# Allegro board demo.brd
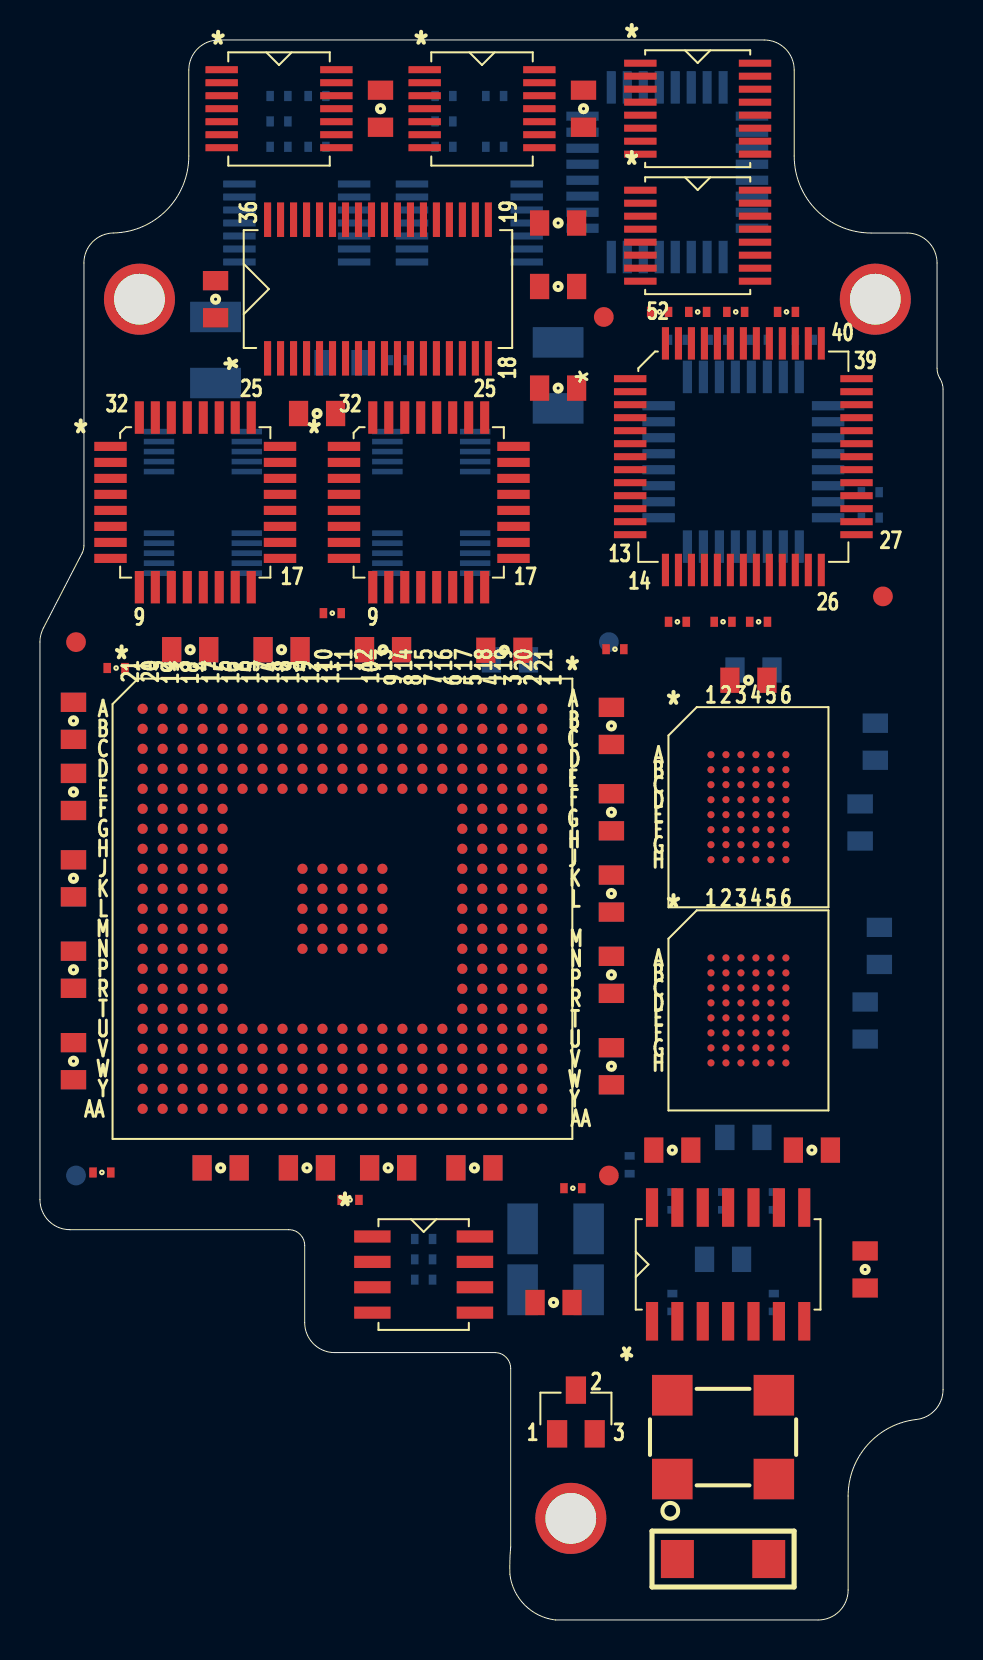
[diagram p0: board, top side]
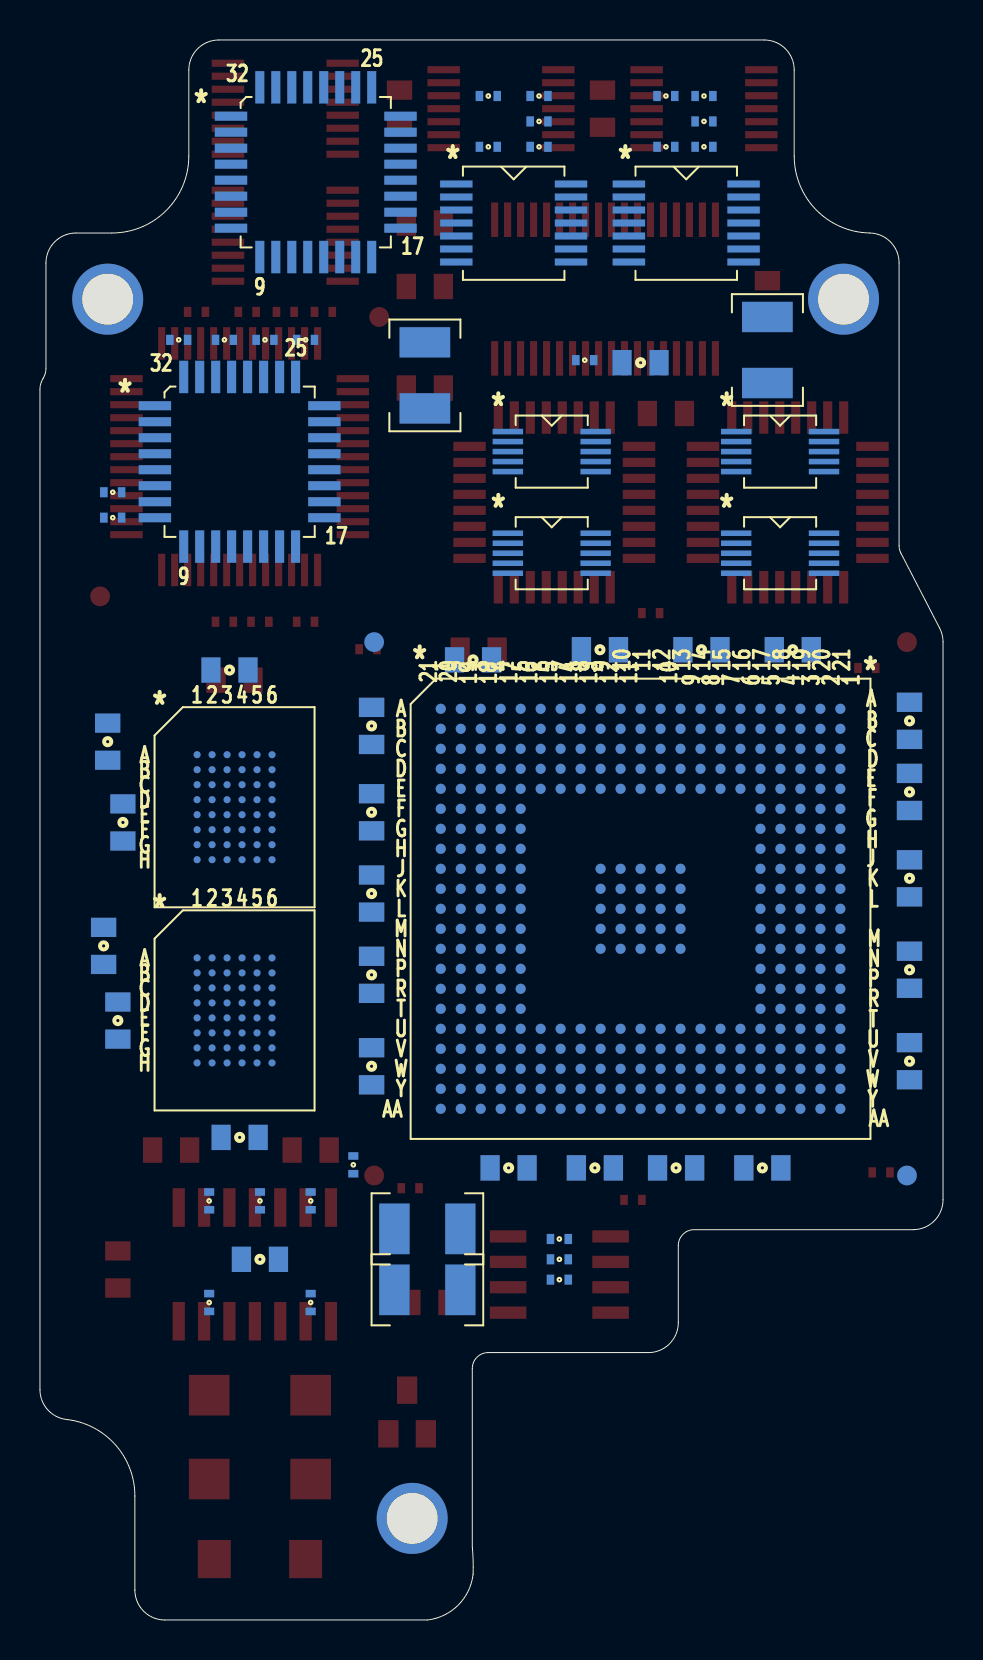
[diagram p1: board, bottom side, seen from below]

Outline 45.2 x 79 mm; copper layers: TOP, POWER, GND, BOTTOM. Coordinates in mm from the lower left corner of the outline.
Outline path: 0,48.9 0,21.02 arc(0.44,19.96) 1.5,19.52 12.46,19.52 arc(13.02,19.28) 13.25,18.73 13.25,14.87 arc(13.69,13.81) 14.75,13.37 22.77,13.37 arc(23.33,13.14) 23.56,12.58 23.56,3.65 arc(23.52,2.97) 23.52,2.29 arc(24.27,0.74) 25.81,0 38.95,0 arc(40.01,0.44) 40.45,1.5 40.45,6.2 arc(41.43,8.77) 43.87,10.03 arc(44.82,10.52) 45.2,11.52 45.2,61.54 arc(45.16,61.81) 45.05,62.06 arc(44.94,62.32) 44.9,62.59 44.9,67.85 arc(44.46,68.91) 43.4,69.35 41.6,69.35 arc(38.88,70.48) 37.75,73.2 37.75,77.5 arc(37.31,78.56) 36.25,79 8.95,79 arc(7.89,78.56) 7.45,77.5 7.45,73.2 arc(6.35,70.5) 3.67,69.35 arc(2.63,68.9) 2.2,67.85 2.2,53.71 arc(2.18,53.52) 2.11,53.35 0.17,49.59 arc(0.04,49.26) 0,48.9

## Design rules (mm)
constraint set DEFAULT: min track width 0.127
net group DP1: nets PECL1_N PECL1_P
net group DP2: nets PECL2_N PECL2_P
net group ADDR_BUS: nets ADDR0 ADDR1 ADDR2 ADDR3 ADDR4 ADDR5 ADDR6 ADDR7 ADDR8 ADDR9 ADDR10

## Placement (name value [footprint] x y rotation side)
C1  120PF  [SMC0805]  28.6 32.26 90 top
C2  120PF  [SMC0805]  1.68 44.96 90 top
C3  120PF  [SMC0805]  1.68 41.4 90 top
C4  120PF  [SMC0805]  1.68 37.08 90 top
C5  120PF  [SMC0805]  1.68 27.94 90 top
C6  120PF  [SMC0805]  1.68 32.51 90 top
C7  120PF  [SMC0805]  17.17 48.51 0 top
C8  120PF  [SMC0805]  28.6 44.7 90 top
C9  120PF  [SMC0805]  28.6 40.39 90 top
C10  120PF  [SMC0805]  28.6 36.32 90 top
C11  120PF  [SMC0805]  28.6 27.69 90 top
C12  120PF  [SMC0805]  23.24 48.49 0 top
C13  120PF  [SMC0805]  9.04 22.61 0 top
C14  120PF  [SMC0805]  13.36 22.61 0 top
C15  120PF  [SMC0805]  17.43 22.61 0 top
C16  120PF  [SMC0805]  21.74 22.61 0 top
C17  120PF  [SMC0805]  35.46 46.99 0 top
C18  120PF  [SMC0805]  41.3 17.53 90 top
C19  120PF  [SMC0805]  7.52 48.51 0 top
C20  120PF  [SMC0805]  12.09 48.51 0 top
C21  120PF  [SMC0805]  1.68 37.08 90 bottom
C22  120PF  [SMC0805]  1.68 32.51 90 bottom
C23  120PF  [SMC0805]  12.09 48.51 0 bottom
C24  120PF  [SMC0805]  1.68 27.94 90 bottom
C25  120PF  [SMC0805]  9.04 22.61 0 bottom
C26  120PF  [SMC0805]  17.17 48.51 0 bottom
C27  120PF  [SMC0805]  23.52 48.01 0 bottom
C28  120PF  [SMC0805]  28.6 44.7 90 bottom
C29  120PF  [SMC0805]  28.6 40.39 90 bottom
C30  120PF  [SMC0805]  28.6 36.32 90 bottom
C31  120PF  [SMC0805]  28.6 32.26 90 bottom
C32  120PF  [SMC0805]  7.52 48.51 0 bottom
C33  120PF  [SMC0805]  17.43 22.61 0 bottom
C34  120PF  [SMC0805]  13.36 22.61 0 bottom
C35  120PF  [SMC0805]  21.74 22.61 0 bottom
C36  120PF  [SMC0805]  28.6 27.69 90 bottom
C37  120PF  [SMC0805]  35.21 24.13 0 bottom
C38  120PF  [SMC0805]  35.71 47.5 0 bottom
C39  120PF  [SMC0805]  1.68 41.4 90 bottom
C40  120PF  [SMC0805]  1.68 44.96 90 bottom
C41  10uF  [1210RF]  8.79 63.5 270 bottom
C42  10uF  [1210RF]  25.93 62.23 270 bottom
C43  10uF  [1210RF]  25.81 16.51 180 bottom
C44  10uF  [1210RF]  25.81 19.56 180 bottom
C45  120PF  [SMC0805]  15.14 62.86 180 bottom
C46  120PF  [SMC0805]  41.3 29.97 90 bottom
C47  120PF  [SMC0805]  42.01 33.71 90 bottom
C48  120PF  [SMC0805]  41.81 43.92 270 bottom
C49  120PF  [SMC0805]  41.05 39.88 90 bottom
C50  120PF  [SMC0805]  34.19 18.03 180 bottom
C51  .1UF  [R_0402]  3.81 47.6 0 top
C52  .1UF  [R_0402]  14.63 50.34 0 top
C53  .1UF  [R_0402]  3.1 22.38 0 top
C54  .1UF  [R_0402]  28.78 48.54 0 top
C55  .1UF  [R_0402]  15.52 21.01 0 top
C56  .1UF  [R_0402]  26.67 21.59 0 top
C57  .1UF  [R_0402]  31.01 65.41 0 top
C58  .1UF  [R_0402]  32.92 65.41 0 top
C59  .1UF  [R_0402]  34.19 49.91 0 top
C60  .1UF  [R_0402]  31.9 49.91 0 top
C61  120PF  [SMC0805]  25.93 66.67 0 top
C62  120PF  [SMC0805]  38.63 23.5 0 top
C63  120PF  [SMC0805]  8.79 66.04 90 top
C64  120PF  [SMC0805]  25.93 69.85 0 top
C65  120PF  [SMC0805]  17.04 75.57 90 top
C66  120PF  [SMC0805]  27.2 75.57 90 top
C67  120PF  [SMC0805]  31.65 23.5 0 top
C68  120PF  [SMC0805]  25.71 15.88 0 top
C69  120PF  [SMC0805]  25.93 61.6 0 top
C70  120PF  [SMC0805]  13.87 60.33 0 top
D1  -  [SOT23_132]  26.82 10.41 0 top
D2  V  [SMF1806]  34.19 3.05 180 top
NOREF  -  [unnamed]  4.98 66.04 0 top
NOREF#2  -  [#2]  -86.33 -76.07 0 top
NOREF#3  -  [unnamed]  26.57 5.08 0 top
NOREF#4  -  [unnamed]  41.81 66.04 0 top
R1  10K  [R_0402]  34.82 65.41 0 top
R2  10K  [R_0402]  37.36 65.41 0 top
R3  10K  [R_0402]  31.9 64.01 180 bottom
R4  10K  [R_0402]  33.94 64.01 180 bottom
R5  10K  [R_0402]  35.97 64.01 180 bottom
R6  10K  [R_0402]  38.25 64.01 180 bottom
R7  10K  [R_0402]  17.93 62.99 180 bottom
R8  10K  [R_0402]  22.76 73.66 180 bottom
R9  10K  [R_0402]  13.87 76.2 180 bottom
R10  10K  [R_0402]  13.87 73.66 180 bottom
R11  10K  [R_0402]  35.97 49.91 0 top
R12  10K  [R_0402]  22.76 76.2 180 bottom
R13  10K  [R_0402]  20.22 76.2 180 bottom
R14  10K  [R_0402]  11.96 73.66 180 bottom
R15  10K  [R_0402]  11.96 76.2 180 bottom
R16  10K  [R_0402]  11.96 74.93 180 bottom
R17  10K  [R_0402]  20.22 74.93 180 bottom
R18  10K  [R_0402]  20.22 73.66 180 bottom
R19  10K  [R_0402]  41.56 56.39 180 bottom
R20  10K  [R_0402]  19.2 18.03 180 bottom
R21  10K  [R_0402]  19.2 19.05 180 bottom
R22  10K  [R_0402]  19.2 17.02 180 bottom
R23  10K  [R_0402]  41.56 55.12 180 bottom
R24  10K  [R_0402]  29.52 22.76 90 bottom
R25  10K  [R_0402]  31.65 20.96 90 bottom
R26  10K  [R_0402]  36.73 15.88 90 bottom
R27  10K  [R_0402]  34.19 20.96 90 bottom
R28  10K  [R_0402]  31.65 15.88 90 bottom
R29  10K  [R_0402]  36.73 20.96 90 bottom
U1  -  [TSSOP14_26CC_BD4-4MM]  11.96 75.57 0 top
U2  -  [TSSOP14_26CC_BD4-4MM]  22.12 75.57 0 top
U3  -  [TSSOP14_26CC_BD4-4MM]  12.85 69.85 180 bottom
U4  -  [TSSOP14_26CC_BD4-4MM]  21.49 69.85 180 bottom
U5  -  [BGA345_BD23X23MM]  15.14 35.56 0 top
U6  -  [BGA345_BD23X23MM]  15.14 35.56 180 bottom
U7  -  [BGA48_BD7-5X9-5MM]  35.46 40.64 0 top
U8  -  [BGA48_BD7-5X9-5MM]  35.46 30.48 0 top
U9  -  [BGA48_BD7-5X9-5MM]  35.46 40.64 180 bottom
U10  -  [BGA48_BD7-5X9-5MM]  35.46 30.48 180 bottom
U11  -  [SO14NB]  34.44 17.78 90 top
U12  -  [TQFP52_BD10X10MM_THERM]  35.21 58.17 0 top
U13  -  [SSOP36_26CC_BD5-3MM]  16.92 66.55 90 top
U14  -  [SO8NB_V2]  19.2 17.27 0 top
U15  -  [TSSOP16_26CC_BD4-4MM]  32.92 69.22 0 top
U16  -  [TSSOP16_26CC_BD4-4MM]  32.92 75.57 0 top
U17  -  [TQFP32_32CC_BD7X7MM]  7.77 55.88 0 top
U18  -  [TQFP32_32CC_BD7X7MM]  19.46 55.88 0 top
U19  -  [TQFP32_32CC_BD7X7MM]  35.21 57.91 180 bottom
U20  -  [TQFP32_32CC_BD7X7MM]  31.4 72.39 180 bottom
U21  -  [MSOP10_20CC_BD3MM]  8.15 58.42 180 bottom
U22  -  [MSOP10_20CC_BD3MM]  8.15 53.34 180 bottom
U23  -  [MSOP10_20CC_BD3MM]  19.58 58.42 180 bottom
U24  -  [MSOP10_20CC_BD3MM]  19.58 53.34 180 bottom
Y1  -  [4CERAMIC]  34.19 9.14 90 top

## Library data of the parts
C1-C40 C45-C50 C61-C70 = CAP: Tolerance: 5%; alternate symbols: (VSMC0805L,VSMC0805R,VSMC0805B,SMC0805); part number: CAP_805-120PF,5%,50V,805; signal model: capacitor120pF; tolerance: 5%
C41-C44 = CAP: Tolerance: +80-20%; User Part Number: 110-1925-01; alternate symbols: (1210RF_WVI_10P;1210RF_V12P;1210WS;1210WS_WVI_10P); part number: CAP_SMT1210-110-1925-01,10UF,+80-20%,16V; tolerance: +80-20%
C51-C60 = CAP: alternate symbols: (VSMC0603L,VSMC0603R,VSMC0603B,SMC0603); part number: CAP_402-.1UF,&10%,80%,6.3V; signal model: capacitor0pF; tolerance: 10%
D1 = RCNET: User Part Number: 120-3831-01; Tolerance: 10%; part number: RCNET_SOT23-120-3831-01,CTXS03,50,46.4,50,150PF,10%; tolerance: 10%
D2 = BEAD_1806: Tolerance: T; User Part Number: P; part number: BEAD_1806_SMF1806-FBMH4516,TAIYO_FERRITE_BEAD,6A
R1-R29 = RES: alternate symbols: (VSMR0402B,VSMR0402R,VSMR0402L,0402); part number: RES_402-10K,1%,0402; signal model: resistor10K; tolerance: 1%
U1-U4 = LVC07: User Part Number: 100-7328-01; Tolerance: ***; part number: LVC07_TSSOP-100-7328-01,APW
U5 U6 = TALON: User Part Number: 528-1123-01; Tolerance: ***; alternate symbols: (BGA345_BD23X23MM_NF); part number: TALON_BGA345-528-1123-01
U7-U10 = SRAM1MX16: User Part Number: 102-0026-01; Tolerance: ***; part number: SRAM1MX16_BGA-102-0026-01,55NS,K6F1616U6A-EF55
U11 = LVC00: User Part Number: 100-4554-01; Tolerance: ***; part number: LVC00_SO-100-4554-01
U12 = MC100ES6220: User Part Number: 103-0009-01; Tolerance: ***; alternate symbols: (TQFP52_BD10X10MM_THERM_NF); part number: MC100ES6220_TQFP-103-0009-01
U13 = LTC3731: User Part Number: 104-0019-01; Tolerance: ***; part number: LTC3731_SSOP36-104-0019-01
U14 = EEPROM8KX8: Tolerance: ***; User Part Number: 101-0054-01; part number: EEPROM8KX8_SO8-101-0054-01,M34D64
U15 U16 = PCA9554: User Part Number: 100-7579-01; Tolerance: ***; part number: PCA9554_TSSOP-100-7579-01
U17-U20 = CY2HH8110: Tolerance: ***; User Part Number: 100-7829-01; part number: CY2HH8110_TQFP-100-7829-01
U21-U24 = MAX1343: User Part Number: 104-0099-01; Tolerance: ***; part number: MAX1343_MSOP-104-0099-01,10BITADC
Y1 = OSC: part number: OSC_CERAMIC-66.00MHZ,CLOCKING,SG8002JF

## Footprints (pads in the part's own frame, mm; a bottom-side part is the same pattern mirrored in y, then rotated)
4CERAMIC
  rect 2.032x2.032 smd: 1(-2.095,2.54) 2(-2.095,-2.54) 3(2.095,-2.54) 4(2.095,2.54)
1210RF
  rect 1.524x2.54 smd: 1(-1.651,0) 2(1.651,0)
BGA48_BD7-5X9-5MM
  round 0.356 smd: A1(-1.875,2.625) A2(-1.125,2.625) A3(-0.375,2.625) A4(0.375,2.625) A5(1.125,2.625) A6(1.875,2.625) B1(-1.875,1.875) B2(-1.125,1.875) B3(-0.375,1.875) B4(0.375,1.875) B5(1.125,1.875) B6(1.875,1.875) C1(-1.875,1.125) C2(-1.125,1.125) C3(-0.375,1.125) C4(0.375,1.125) C5(1.125,1.125) C6(1.875,1.125) D1(-1.875,0.375) D2(-1.125,0.375) D3(-0.375,0.375) D4(0.375,0.375) D5(1.125,0.375) D6(1.875,0.375) E1(-1.875,-0.375) E2(-1.125,-0.375) E3(-0.375,-0.375) E4(0.375,-0.375) E5(1.125,-0.375) E6(1.875,-0.375) F1(-1.875,-1.125) F2(-1.125,-1.125) F3(-0.375,-1.125) F4(0.375,-1.125) F5(1.125,-1.125) F6(1.875,-1.125) G1(-1.875,-1.875) G2(-1.125,-1.875) G3(-0.375,-1.875) G4(0.375,-1.875) G5(1.125,-1.875) G6(1.875,-1.875) H1(-1.875,-2.625) H2(-1.125,-2.625) H3(-0.375,-2.625) H4(0.375,-2.625) H5(1.125,-2.625) H6(1.875,-2.625)
BGA345_BD23X23MM
  round 0.991 smd: (-13.335,13.335) (13.335,-13.335)
  round 0.508 smd: A1(-10,10) A2(-9,10) A3(-8,10) A4(-7,10) A5(-6,10) A6(-5,10) A7(-4,10) A8(-3,10) A9(-2,10) A10(-1,10) A11(0,10) A12(1,10) A13(2,10) A14(3,10) A15(4,10) A16(5,10) A17(6,10) A18(7,10) A19(8,10) A20(9,10) A21(10,10) AA1(-10,-10) AA2(-9,-10) AA3(-8,-10) AA4(-7,-10) AA5(-6,-10) AA6(-5,-10) AA7(-4,-10) AA8(-3,-10) AA9(-2,-10) AA10(-1,-10) AA11(0,-10) AA12(1,-10) AA13(2,-10) AA14(3,-10) AA15(4,-10) AA16(5,-10) AA17(6,-10) AA18(7,-10) AA19(8,-10) AA20(9,-10) AA21(10,-10) B1(-10,9) B2(-9,9) B3(-8,9) B4(-7,9) B5(-6,9) B6(-5,9) B7(-4,9) B8(-3,9) B9(-2,9) B10(-1,9) B11(0,9) B12(1,9) B13(2,9) B14(3,9) B15(4,9) B16(5,9) B17(6,9) B18(7,9) B19(8,9) B20(9,9) B21(10,9) C1(-10,8) C2(-9,8) C3(-8,8) C4(-7,8) C5(-6,8) C6(-5,8) C7(-4,8) C8(-3,8) C9(-2,8) C10(-1,8) C11(0,8) C12(1,8) C13(2,8) C14(3,8) C15(4,8) C16(5,8) C17(6,8) C18(7,8) C19(8,8) C20(9,8) C21(10,8) D1(-10,7) D2(-9,7) D3(-8,7) D4(-7,7) D5(-6,7) D6(-5,7) D7(-4,7) D8(-3,7) D9(-2,7) D10(-1,7) D11(0,7) D12(1,7) D13(2,7) D14(3,7) D15(4,7) D16(5,7) D17(6,7) D18(7,7) D19(8,7) D20(9,7) D21(10,7) E1(-10,6) E2(-9,6) E3(-8,6) E4(-7,6) E5(-6,6) E6(-5,6) E7(-4,6) E8(-3,6) E9(-2,6) E10(-1,6) E11(0,6) E12(1,6) E13(2,6) E14(3,6) E15(4,6) E16(5,6) E17(6,6) E18(7,6) E19(8,6) E20(9,6) E21(10,6) F1(-10,5) F2(-9,5) F3(-8,5) F4(-7,5) F5(-6,5) F17(6,5) F18(7,5) F19(8,5) F20(9,5) F21(10,5) G1(-10,4) G2(-9,4) G3(-8,4) G4(-7,4) G5(-6,4) G17(6,4) G18(7,4) G19(8,4) G20(9,4) G21(10,4) H1(-10,3) H2(-9,3) H3(-8,3) H4(-7,3) H5(-6,3) H17(6,3) H18(7,3) H19(8,3) H20(9,3) H21(10,3) J1(-10,2) J2(-9,2) J3(-8,2) J4(-7,2) J5(-6,2) J9(-2,2) J10(-1,2) J11(0,2) J12(1,2) J13(2,2) J17(6,2) J18(7,2) J19(8,2) J20(9,2) J21(10,2) K1(-10,1) K2(-9,1) K3(-8,1) K4(-7,1) K5(-6,1) K9(-2,1) K10(-1,1) K11(0,1) K12(1,1) K13(2,1) K17(6,1) K18(7,1) K19(8,1) K20(9,1) K21(10,1) L1(-10,0) L2(-9,0) L3(-8,0) L4(-7,0) L5(-6,0) L9(-2,0) L10(-1,0) L11(0,0) L12(1,0) L13(2,0) L17(6,0) L18(7,0) L19(8,0) L20(9,0) L21(10,0) M1(-10,-1) M2(-9,-1) M3(-8,-1) M4(-7,-1) M5(-6,-1) M9(-2,-1) M10(-1,-1) M11(0,-1) M12(1,-1) M13(2,-1) M17(6,-1) M18(7,-1) M19(8,-1) M20(9,-1) M21(10,-1) N1(-10,-2) N2(-9,-2) N3(-8,-2) N4(-7,-2) N5(-6,-2) N9(-2,-2) N10(-1,-2) N11(0,-2) N12(1,-2) N13(2,-2) N17(6,-2) N18(7,-2) N19(8,-2) N20(9,-2) N21(10,-2) P1(-10,-3) P2(-9,-3) P3(-8,-3) P4(-7,-3) P5(-6,-3) P17(6,-3) P18(7,-3) P19(8,-3) P20(9,-3) P21(10,-3) R1(-10,-4) R2(-9,-4) R3(-8,-4) R4(-7,-4) R5(-6,-4) R17(6,-4) R18(7,-4) R19(8,-4) R20(9,-4) R21(10,-4) T1(-10,-5) T2(-9,-5) T3(-8,-5) T4(-7,-5) T5(-6,-5) T17(6,-5) T18(7,-5) T19(8,-5) T20(9,-5) T21(10,-5) U1(-10,-6) U2(-9,-6) U3(-8,-6) U4(-7,-6) U5(-6,-6) U6(-5,-6) U7(-4,-6) U8(-3,-6) U9(-2,-6) U10(-1,-6) U11(0,-6) U12(1,-6) U13(2,-6) U14(3,-6) U15(4,-6) U16(5,-6) U17(6,-6) U18(7,-6) U19(8,-6) U20(9,-6) U21(10,-6) V1(-10,-7) V2(-9,-7) V3(-8,-7) V4(-7,-7) V5(-6,-7) V6(-5,-7) V7(-4,-7) V8(-3,-7) V9(-2,-7) V10(-1,-7) V11(0,-7) V12(1,-7) V13(2,-7) V14(3,-7) V15(4,-7) V16(5,-7) V17(6,-7) V18(7,-7) V19(8,-7) V20(9,-7) V21(10,-7) W1(-10,-8) W2(-9,-8) W3(-8,-8) W4(-7,-8) W5(-6,-8) W6(-5,-8) W7(-4,-8) W8(-3,-8) W9(-2,-8) W10(-1,-8) W11(0,-8) W12(1,-8) W13(2,-8) W14(3,-8) W15(4,-8) W16(5,-8) W17(6,-8) W18(7,-8) W19(8,-8) W20(9,-8) W21(10,-8) Y1(-10,-9) Y2(-9,-9) Y3(-8,-9) Y4(-7,-9) Y5(-6,-9) Y6(-5,-9) Y7(-4,-9) Y8(-3,-9) Y9(-2,-9) Y10(-1,-9) Y11(0,-9) Y12(1,-9) Y13(2,-9) Y14(3,-9) Y15(4,-9) Y16(5,-9) Y17(6,-9) Y18(7,-9) Y19(8,-9) Y20(9,-9) Y21(10,-9)
MSOP10_20CC_BD3MM
  rect 1.524x0.279 smd: 1(-2.197,1) 2(-2.197,0.5) 3(-2.197,0) 4(-2.197,-0.5) 5(-2.197,-1) 6(2.197,-1) 7(2.197,-0.5) 8(2.197,0) 9(2.197,0.5) 10(2.197,1)
R_0402
  rect 0.381x0.508 smd: 1(-0.445,0) 2(0.445,0)
SMC0805
  rect 0.965x1.27 smd: 1(-0.927,0) 2(0.927,0)
SMF1806
  rect 1.651x1.905 smd: 1(-2.286,0) 2(2.286,0)
SO8NB_V2
  rect 1.829x0.61 smd: 1(-2.565,1.905) 2(-2.565,0.635) 3(-2.565,-0.635) 4(-2.565,-1.905) 5(2.565,-1.905) 6(2.565,-0.635) 7(2.565,0.635) 8(2.565,1.905)
SO14NB
  rect 1.93x0.61 smd: 1(-2.845,3.81) 2(-2.845,2.54) 3(-2.845,1.27) 4(-2.845,0) 5(-2.845,-1.27) 6(-2.845,-2.54) 7(-2.845,-3.81) 8(2.845,-3.81) 9(2.845,-2.54) 10(2.845,-1.27) 11(2.845,0) 12(2.845,1.27) 13(2.845,2.54) 14(2.845,3.81)
SOT23_132
  rect 1.016x1.372 smd: 1(-0.94,-1.105) 2(0,1.079) 3(0.94,-1.105)
SSOP36_26CC_BD5-3MM
  rect 1.727x0.356 smd: 1(-3.467,5.525) 2(-3.467,4.875) 3(-3.467,4.225) 4(-3.467,3.575) 5(-3.467,2.925) 6(-3.467,2.275) 7(-3.467,1.625) 8(-3.467,0.975) 9(-3.467,0.325) 10(-3.467,-0.325) 11(-3.467,-0.975) 12(-3.467,-1.625) 13(-3.467,-2.275) 14(-3.467,-2.925) 15(-3.467,-3.575) 16(-3.467,-4.225) 17(-3.467,-4.875) 18(-3.467,-5.525) 19(3.467,-5.525) 20(3.467,-4.875) 21(3.467,-4.225) 22(3.467,-3.575) 23(3.467,-2.925) 24(3.467,-2.275) 25(3.467,-1.625) 26(3.467,-0.975) 27(3.467,-0.325) 28(3.467,0.325) 29(3.467,0.975) 30(3.467,1.625) 31(3.467,2.275) 32(3.467,2.925) 33(3.467,3.575) 34(3.467,4.225) 35(3.467,4.875) 36(3.467,5.525)
TQFP32_32CC_BD7X7MM
  rect 1.626x0.457 smd: 1(-4.242,2.8) 2(-4.242,2) 3(-4.242,1.2) 4(-4.242,0.4) 5(-4.242,-0.4) 6(-4.242,-1.2) 7(-4.242,-2) 8(-4.242,-2.8) 17(4.242,-2.8) 18(4.242,-2) 19(4.242,-1.2) 20(4.242,-0.4) 21(4.242,0.4) 22(4.242,1.2) 23(4.242,2) 24(4.242,2.8)
  rect 0.457x1.626 smd: 9(-2.8,-4.242) 10(-2,-4.242) 11(-1.2,-4.242) 12(-0.4,-4.242) 13(0.4,-4.242) 14(1.2,-4.242) 15(2,-4.242) 16(2.8,-4.242) 25(2.8,4.242) 26(2,4.242) 27(1.2,4.242) 28(0.4,4.242) 29(-0.4,4.242) 30(-1.2,4.242) 31(-2,4.242) 32(-2.8,4.242)
TQFP52_BD10X10MM_THERM
  round 0.991 smd: (-6.985,6.985) (6.985,-6.985)
  rect 1.626x0.356 smd: 1(-5.664,3.9) 2(-5.664,3.25) 3(-5.664,2.6) 4(-5.664,1.95) 5(-5.664,1.3) 6(-5.664,0.65) 7(-5.664,0) 8(-5.664,-0.65) 9(-5.664,-1.3) 10(-5.664,-1.95) 11(-5.664,-2.6) 12(-5.664,-3.25) 13(-5.664,-3.9) 27(5.664,-3.9) 28(5.664,-3.25) 29(5.664,-2.6) 30(5.664,-1.95) 31(5.664,-1.3) 32(5.664,-0.65) 33(5.664,0) 34(5.664,0.65) 35(5.664,1.3) 36(5.664,1.95) 37(5.664,2.6) 38(5.664,3.25) 39(5.664,3.9)
  rect 0.356x1.626 smd: 14(-3.9,-5.664) 15(-3.25,-5.664) 16(-2.6,-5.664) 17(-1.95,-5.664) 18(-1.3,-5.664) 19(-0.65,-5.664) 20(0,-5.664) 21(0.65,-5.664) 22(1.3,-5.664) 23(1.95,-5.664) 24(2.6,-5.664) 25(3.25,-5.664) 26(3.9,-5.664) 40(3.9,5.664) 41(3.25,5.664) 42(2.6,5.664) 43(1.95,5.664) 44(1.3,5.664) 45(0.65,5.664) 46(0,5.664) 47(-0.65,5.664) 48(-1.3,5.664) 49(-1.95,5.664) 50(-2.6,5.664) 51(-3.25,5.664) 52(-3.9,5.664)
TSSOP14_26CC_BD4-4MM
  rect 1.626x0.356 smd: 1(-2.87,1.95) 2(-2.87,1.3) 3(-2.87,0.65) 4(-2.87,0) 5(-2.87,-0.65) 6(-2.87,-1.3) 7(-2.87,-1.95) 8(2.87,-1.95) 9(2.87,-1.3) 10(2.87,-0.65) 11(2.87,0) 12(2.87,0.65) 13(2.87,1.3) 14(2.87,1.95)
TSSOP16_26CC_BD4-4MM
  rect 1.626x0.356 smd: 1(-2.87,2.275) 2(-2.87,1.625) 3(-2.87,0.975) 4(-2.87,0.325) 5(-2.87,-0.325) 6(-2.87,-0.975) 7(-2.87,-1.625) 8(-2.87,-2.275) 9(2.87,-2.275) 10(2.87,-1.625) 11(2.87,-0.975) 12(2.87,-0.325) 13(2.87,0.325) 14(2.87,0.975) 15(2.87,1.625) 16(2.87,2.275)
unnamed
  round 3.556 hole 2.54 unplated: (0,0)

## Nets
GND: C1.2(B<0>) C2.2(B<0>) C3.2(B<0>) C4.2(B<0>) C5.2(B<0>) C6.2(B<0>) C7.2(B<0>) C8.2(B<0>) C9.2(B<0>) C10.2(B<0>) C11.2(B<0>) C12.2(B<0>) C13.2(B<0>) C14.2(B<0>) C15.2(B<0>) C16.2(B<0>) C17.2(B<0>) C18.2(B<0>) C19.2(B<0>) C20.2(B<0>) C21.2(B<0>) C22.2(B<0>) C23.2(B<0>) C24.2(B<0>) C25.2(B<0>) C26.2(B<0>) C27.2(B<0>) C28.2(B<0>) C29.2(B<0>) C30.2(B<0>) C31.2(B<0>) C32.2(B<0>) C33.2(B<0>) C34.2(B<0>) C35.2(B<0>) C36.2(B<0>) C37.2(B<0>) C38.2(B<0>) C39.2(B<0>) C40.2(B<0>) C41.2(B<0>) C42.2(B<0>) C43.1 C44.1 C45.2(B<0>) C46.2(B<0>) C47.2(B<0>) C48.2(B<0>) C49.2(B<0>) C50.2(B<0>) C51.2(B<0>) C52.2(B<0>) C53.2(B<0>) C54.2(B<0>) C55.2(B<0>) C56.2(B<0>) C57.2(B<0>) C58.2(B<0>) C59.2(B<0>) C60.2(B<0>) U1.1 U2.1 U3.1 U4.1 U6.C6 U6.C10 U6.C14 U6.C17 U6.D3 U6.F19 U6.G20 U6.K3 U6.K9 U6.K11 U6.K13 U6.M9 U6.M11 U6.M13 U6.M19 U6.N17 U6.P3 U6.U18 U6.V7 U6.V13 U9.D3 U9.D4 U9.F3 U9.F4 U10.D3 U10.D4 U10.F3 U10.F4 U11.7 U12.7 U12.13 U12.20 U12.26 U12.29 U12.36 U12.45 U12.52 U13.7 U13.15 U13.22 U13.34 U14.1 U14.7(WC_N) U15.1 U16.1 U17.4 U17.13 U17.21 U17.28 U18.4 U18.13 U18.21 U18.29(VDD<8>) U19.3 U19.14 U19.18 U19.22 U19.28 U20.4 U20.13 U20.18 U20.29(VDD<8>) U21.1 U22.1 U23.1 U24.1
VCC: C1.1 C2.1 C3.1 C4.1 C5.1 C6.1 C7.1 C8.1 C9.1 C10.1 C11.1 C12.1 C13.1 C14.1 C15.1 C16.1 C17.1 C18.1 C19.1 C20.1 C21.1 C22.1 C23.1 C24.1 C25.1 C26.1 C27.1 C28.1 C29.1 C30.1 C31.1 C32.1 C33.1 C34.1 C35.1 C36.1 C37.1 C38.1 C39.1 C40.1 C41.1 C42.1 C43.2(B<0>) C44.2(B<0>) C45.1 C46.1 C47.1 C48.1 C49.1 C50.1 C51.1 C52.1 C53.1 C54.1 C55.1 C56.1 C57.1 C58.1 C59.1 C60.1 D2.1 R22.2(B<0>) R23.2(B<0>) R24.2(B<0>) R25.2(B<0>) R26.2(B<0>) R27.2(B<0>) R28.2(B<0>) R29.2(B<0>) U1.5 U1.8 U2.5 U2.8 U3.8 U4.8 U6.B12 U6.C16 U6.C18 U6.D6 U6.D10 U6.D14 U6.D17 U6.D20 U6.E3 U6.F2 U6.G5 U6.G19 U6.H19 U6.H20 U6.J3 U6.J9 U6.J10 U6.J11 U6.J12 U6.J13 U6.K10 U6.K12 U6.L2 U6.L9 U6.L10 U6.L11 U6.L12 U6.L13 U6.L17 U6.M5 U6.M10 U6.M12 U6.M18 U6.N3 U6.N9 U6.N10 U6.N11 U6.N12 U6.N13 U6.N19 U6.R17 U6.T5 U6.T18 U6.U13 U6.U16 U6.U17 U6.V6 U6.V12 U6.W16 U9.C3 U9.C4 U9.E3 U9.E4 U10.C3 U10.C4 U10.E3 U10.E4 U11.14 U12.6 U12.12 U12.19 U12.25 U12.28 U12.37 U13.5 U13.18 U13.27 U13.36 U15.9 U15.14 U16.9 U16.13 U17.5 U17.19 U17.27 U18.14 U18.27 U20.5 U20.12 U20.19 U20.30 U21.9 U21.10(VDD) U22.9 U22.10(VDD) U23.9 U23.10(VDD) U24.9 U24.10(VDD) Y1.2 Y1.4(VCC)
A1: U6.B3 U12.14
A2: U6.C3 U12.15
A3: U6.A3 U12.16
A4: U6.C4 U12.17
A5: U6.D4 U12.18
A6: U6.C5 U12.21
A7: U6.B5 U12.23
ADDR0: U6.V5 U9.H2 U10.H2
ADDR1: U6.U2 U9.H6 U10.H6
ADDR2: U6.T2 U9.H5 U10.H5
ADDR3: U6.T3 U9.G6 U10.G6
ADDR4: U6.U3 U9.G5(WE_N) U10.G5(WE_N)
ADDR5: U6.T4 U9.G4 U10.G4
ADDR6: U6.U4 U9.H4 U10.H4
ADDR7: U6.V4 U9.H3 U10.H3
ADDR8: U6.T1 U9.G2 U10.G2
ADDR9: U6.R4 U9.H1 U10.H1
ADDR10: U6.R5 U9.G1 U10.G1
CLK_OUT: Y1.3
HDI_STACK: U3.9 U4.2(Y<1>) U13.32 U15.3 U20.6
NET1: U1.9 U4.13
NET2: U1.10 U4.12
NET3: U1.11 U4.11
NET4: U6.A19 U12.9(VEE2) U17.6 U18.6
NET5: D1.2 D2.2(B) U11.2 U14.2
NET7: D1.1 U14.3
NET8: R16.2(B<0>) U2.9 U12.11 U15.2 U17.30 U18.9 U19.27 U20.22
NET9: U12.8 U15.10 U17.2 U18.1
NET11: U2.13 U16.15
NET12: R14.2(B<0>) U3.12 U4.3 U4.9 U20.2
NET13: U12.34 U17.23 U18.23
NET14: U19.8 U21.4 U22.6 U23.4
NET15: U19.17 U22.8 U24.7
NET16: U2.6 U4.5 U12.22 U19.10
NET17: U6.V21 U13.9 U17.11
NET20: U6.W19 U13.10 U17.32
NET21: U6.W10 U17.16
NET24: U3.7 U6.AA4 U11.3(Y_N<0>) U11.4 U16.14 U17.18 U20.17
NET25: U3.2(Y<1>) U6.Y10 U11.11 U17.29(VDD<8>)
NET28: U6.V20 U11.6 U14.5 U18.31
NET30: R15.2(B<0>) U1.2(Y<1>) U2.2(Y<1>) U16.2 U16.11 U20.1 U20.28
NET31: R13.1 U1.3 U1.14 U2.3
NET32: R17.1 U1.4 U2.4
NET33: R11.2(B<0>) U6.H2 U14.4 U19.12
NET34: U16.10 U20.24
PECL1_N: U3.11 U6.Y13 U11.10 U17.3
PECL1_P: U1.12 U3.10 U6.U15 U11.9 U17.26
PECL2_N: U6.V9 U11.13 U17.17
PECL2_P: U6.W5 U11.12 U18.16 U20.15
PHASE_N: U6.E7 U12.3
PHASE_P: U6.E8 U12.2

Pads without a net: C61 1 2; C62 1 2; C63 1 2; C64 1 2; C65 1 2; C66 1 2; C67 1 2; C68 1 2; C69 1 2; C70 1 2; D1 3; R1 1 2; R2 1 2; R3 1 2; R4 1 2; R5 1 2; R6 1 2; R7 1 2; R8 1 2; R9 1 2; R10 1 2; R11 1; R12 1 2; R13 2; R14 1; R15 1; R16 1; R17 2; R18 1 2; R19 1 2; R20 1 2; R21 1 2; R22 1; R23 1; R24 1; R25 1; R26 1; R27 1; R28 1; R29 1; U1 6 7 13; U2 7 10 11 12 14; U3 3 4 5 6 13 14; U4 4 6 7 10 14; U5 A1 A2 A3 A4 A5 A6 A7 A8 A9 A10 A11 A12 A13 A14 A15 A16 A17 A18 A19 A20 A21 AA1 AA2 AA3 AA4 AA5 AA6 AA7 AA8 AA9 AA10 AA11 AA12 AA13 AA14 AA15 AA16 AA17 AA18 AA19 AA20 AA21 B1 B2 B3 B4 B5 B6 B7 B8 B9 B10 B11 B12 B13 B14 B15 B16 B17 B18 B19 B20 B21 C1 C2 C3 C4 C5 C6 C7 C8 C9 C10 C11 C12 C13 C14 C15 C16 C17 C18 C19 C20 C21 D1 D2 D3 D4 D5 D6 D7 D8 D9 D10 D11 D12 D13 D14 D15 D16 D17 D18 D19 D20 D21 E1 E2 E3 E4 E5 E6 E7 E8 E9 E10 E11 E12 E13 E14 E15 E16 E17 E18 E19 E20 E21 F1 F2 F3 F4 F5 F17 F18 F19 F20 F21 G1 G2 G3 G4 G5 G17 G18 G19 G20 G21 H1 H2 H3 H4 H5 H17 H18 H19 H20 H21 J1 J2 J3 J4 J5 J9 J10 J11 J12 J13 J17 J18 J19 J20 J21 K1 K2 K3 K4 K5 K9 K10 K11 K12 K13 K17 K18 K19 K20 K21 L1 L2 L3 L4 L5 L9 L10 L11 L12 L13 L17 L18 L19 L20 L21 M1 M2 M3 M4 M5 M9 M10 M11 M12 M13 M17 M18 M19 M20 M21 N1 N2 N3 N4 N5 N9 N10 N11 N12 N13 N17 N18 N19 N20 N21 P1 P2 P3 P4 P5 P17 P18 P19 P20 P21 R1 R2 R3 R4 R5 R17 R18 R19 R20 R21 T1 T2 T3 T4 T5 T17 T18 T19 T20 T21 U1 U2 U3 U4 U5 U6 U7 U8 U9 U10 U11 U12 U13 U14 U15 U16 U17 U18 U19 U20 U21 V1 V2 V3 V4 V5 V6 V7 V8 V9 V10 V11 V12 V13 V14 V15 V16 V17 V18 V19 V20 V21 W1 W2 W3 W4 W5 W6 W7 W8 W9 W10 W11 W12 W13 W14 W15 W16 W17 W18 W19 W20 W21 Y1 Y2 Y3 Y4 Y5 Y6 Y7 Y8 Y9 Y10 Y11 Y12 Y13 Y14 Y15 Y16 Y17 Y18 Y19 Y20 Y21; U6 A1 A2 A4 A5 A6 A7 A8 A9 A10 A11 A12 A13 A14 A15 A16 A17 A18 A20 A21 AA1 AA2 AA3 AA5 AA6 AA7 AA8 AA9 AA10 AA11 AA12 AA13 AA14 AA15 AA16 AA17 AA18 AA19 AA20 AA21 B1 B2 B4 B6 B7 B8 B9 B10 B11 B13 B14 B15 B16 B17 B18 B19 B20 B21 C1 C2 C7 C8 C9 C11 C12 C13 C15 C19 C20 C21 D1 D2 D5 D7 D8 D9 D11 D12 D13 D15 D16 D18 D19 D21 E1 E2 E4 E5 E6 E9 E10 E11 E12 E13 E14 E15 E16 E17 E18 E19 E20 E21 F1 F3 F4 F5 F17 F18 F20 F21 G1 G2 G3 G4 G17 G18 G21 H1 H3 H4 H5 H17 H18 H21 J1 J2 J4 J5 J17 J18 J19 J20 J21 K1 K2 K4 K5 K17 K18 K19 K20 K21 L1 L3 L4 L5 L18 L19 L20 L21 M1 M2 M3 M4 M17 M20 M21 N1 N2 N4 N5 N18 N20 N21 P1 P2 P4 P5 P17 P18 P19 P20 P21 R1 R2 R3 R18 R19 R20 R21 T17 T19 T20 T21 U1 U5 U6 U7 U8 U9 U10 U11 U12 U14 U19 U20 U21 V1 V2 V3 V8 V10 V11 V14 V15 V16 V17 V18 V19 W1 W2 W3 W4 W6 W7 W8 W9 W11 W12 W13 W14 W15 W17 W18 W20 W21 Y1 Y2 Y3 Y4 Y5 Y6 Y7 Y8 Y9 Y11 Y12 Y14 Y15 Y16 Y17 Y18 Y19 Y20 Y21; U7 A1 A2 A3 A4 A5 A6 B1 B2 B3 B4 B5 B6 C1 C2 C3 C4 C5 C6 D1 D2 D3 D4 D5 D6 E1 E2 E3 E4 E5 E6 F1 F2 F3 F4 F5 F6 G1 G2 G3 G4 G5 G6 H1 H2 H3 H4 H5 H6; U8 A1 A2 A3 A4 A5 A6 B1 B2 B3 B4 B5 B6 C1 C2 C3 C4 C5 C6 D1 D2 D3 D4 D5 D6 E1 E2 E3 E4 E5 E6 F1 F2 F3 F4 F5 F6 G1 G2 G3 G4 G5 G6 H1 H2 H3 H4 H5 H6; U9 A1 A2 A3 A4 A5 A6 B1 B2 B3 B4 B5 B6 C1 C2 C5 C6 D1 D2 D5 D6 E1 E2 E5 E6 F1 F2 F5 F6 G3; U10 A1 A2 A3 A4 A5 A6 B1 B2 B3 B4 B5 B6 C1 C2 C5 C6 D1 D2 D5 D6 E1 E2 E5 E6 F1 F2 F5 F6 G3; U11 1 5 8; U12 1 4 5 10 24 27 30 31 32 33 35 38 39 40 41 42 43 44 46 47 48 49 50 51; U13 1 2 3 4 6 8 11 12 13 14 16 17 19 20 21 23 24 25 26 28 29 30 31 33 35; U14 6 8; U15 4 5 6 7 8 11 12 13 15 16; U16 3 4 5 6 7 8 12 16; U17 1 7 8 9 10 12 14 15 20 22 24 25 31; U18 2 3 5 7 8 10 11 12 15 17 18 19 20 22 24 25 26 28 30 32; U19 1 2 4 5 6 7 9 11 13 15 16 19 20 21 23 24 25 26 29 30 31 32; U20 3 7 8 9 10 11 14 16 20 21 23 25 26 27 31 32; U21 2 3 5 6 7 8; U22 2 3 4 5 7; U23 2 3 5 6 7 8; U24 2 3 4 5 6 8; Y1 1

## Text on the board
User.Comments: 1:1 | 1 of 1
